# EAGLE board scout_mk2 (EAGLE 7.1.0)
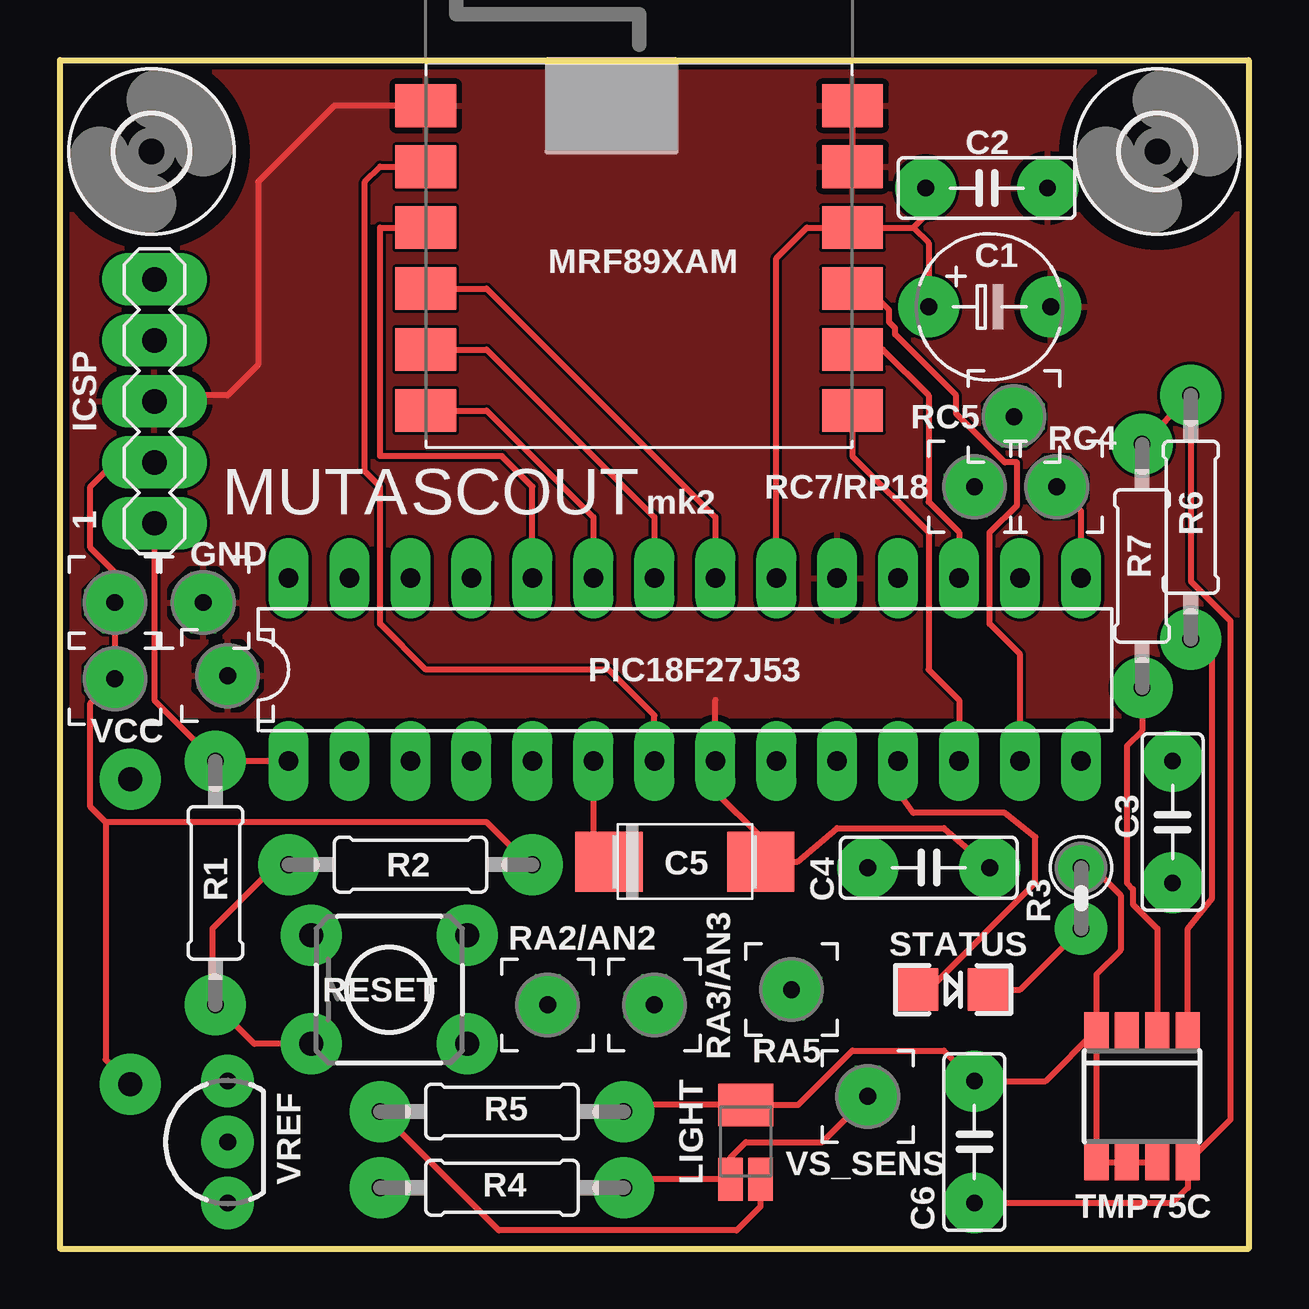
[diagram p0: board, top side]
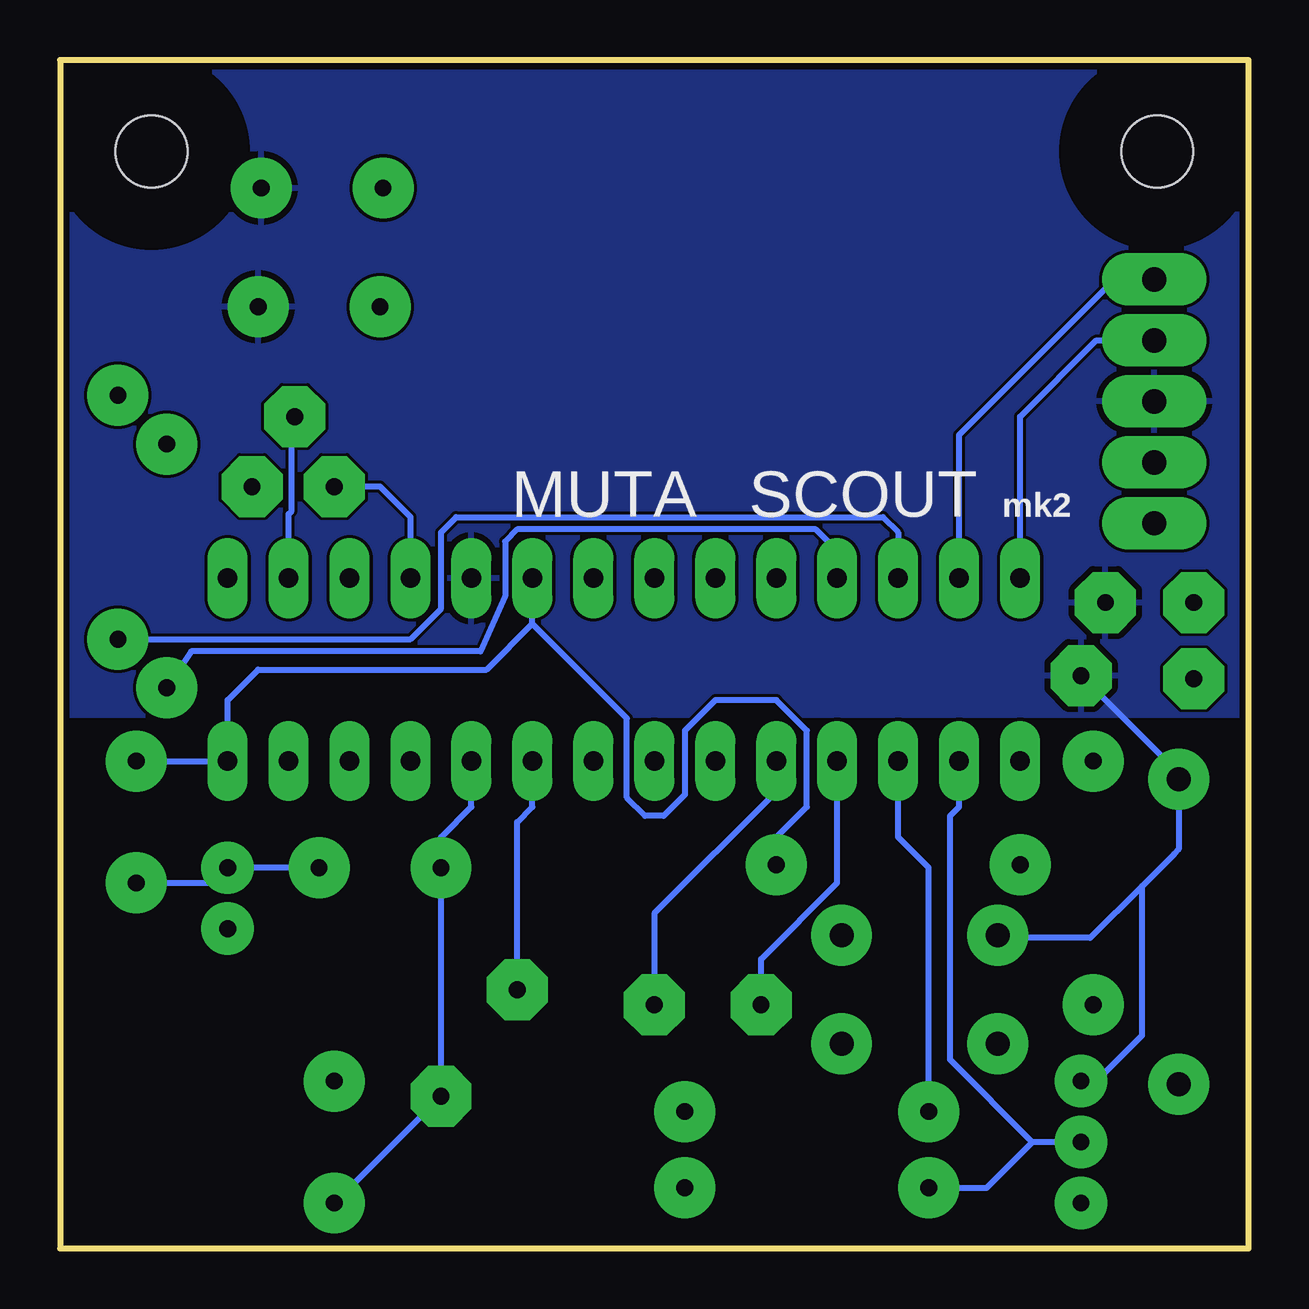
[diagram p1: board, bottom side, seen from below]

Size 49.53 x 49.53 mm. Coordinates in mm from the lower left corner, seen from the top.
Outline: 0,49.53 49.53,49.53 49.53,0 0,0 0,49.53
Copper layers (1*16): Top 0.035mm / dielectric 1.5mm / Bottom 0.035mm
Design rules "dirt_cheap_dirty_boards.v1": minimum track width 5mil, minimum drill 12mil, track to track 5mil, track to pad 5mil, pad to pad 5mil, via to via 5mil, smd to smd 0mil, copper to edge 10mil, drill to drill 10mil, minimum pad ring 10mil, minimum via ring 6mil, stop-mask expansion 2mil, vias tented up to drill 25mil, thermal gap 10mil

## Footprints (pad centres in the part's own frame; a part is rotated, then mirrored left to right if it is on the bottom)
2XAAA = drill 1 pad 2.54: P$1 0,12.7; P$2 0,0
TT5D6 = drill 0.7 pad 2.54: + -2.54,0; - 2.54,0
C050-025X075 = drill 0.7 pad 2.54: 1 -2.54,0; 2 2.54,0
C/6032-28R = smd 2.794 x 2.5: + 3.16,0; - -3.16,0
3,81/1,1 = drill 0.7 pad 2.54 octagon: 1 0,0
MA05-1 = drill 1.016 pad 2.184 long: 1 -5.08,0; 2 -2.54,0; 3 0,0; 4 2.54,0; 5 5.08,0
SFH5711 = smd 2.286 x 1.778: 1_2 0,1.549 | smd 1.016 x 1.778: 3 -0.635,-1.549; 4 0.61,-1.549
MRF89XAMXA = smd 2.54 x 1.778: 1 -8.89,-1.27; 2 -8.89,-3.81; 3 -8.89,-6.35; 4 -8.89,-8.89; 5 -8.89,-11.43; 6 -8.89,-13.97; 7 8.89,-13.97; 8 8.89,-11.43; 9 8.89,-8.89; 10 8.89,-6.35; 11 8.89,-3.81; 12 8.89,-1.27
DIL28-3 = drill 0.813 pad 1.676 long: 1 -16.51,-3.81; 2 -13.97,-3.81; 3 -11.43,-3.81; 4 -8.89,-3.81; 5 -6.35,-3.81; 6 -3.81,-3.81; 7 -1.27,-3.81; 8 1.27,-3.81; 9 3.81,-3.81; 10 6.35,-3.81; 11 8.89,-3.81; 12 11.43,-3.81; 13 13.97,-3.81; 14 16.51,-3.81; 15 16.51,3.81; 16 13.97,3.81; 17 11.43,3.81; 18 8.89,3.81; 19 6.35,3.81; 20 3.81,3.81; 21 1.27,3.81; 22 -1.27,3.81; 23 -3.81,3.81; 24 -6.35,3.81; 25 -8.89,3.81; 26 -11.43,3.81; 27 -13.97,3.81; 28 -16.51,3.81
0207/10 = drill 0.7 pad 2.54: 1 -5.08,0; 2 5.08,0
0207/2V = drill 0.7 pad 2.184: 1 -1.27,0; 2 1.27,0
TACTILE-PTH = drill 1 pad 2.54: 1 -3.251,2.261; 2 3.251,2.261; 3 -3.251,-2.261; 4 3.251,-2.261
LED-1206 = smd 1.778 x 1.778: A -1.5,0; C 1.5,0
SOIC8 = smd 1.016 x 1.5: 1 -1.905,-2.75; 2 -0.635,-2.75; 3 0.635,-2.75; 4 1.905,-2.75; 5 1.905,2.75; 6 0.635,2.75; 7 -0.635,2.75; 8 -1.905,2.75
3,0 = hole 3: 0,0
LP_O-PBCY-W3 = drill 0.7 pad 2.184: 1 -2.54,0; 2 0,0; 3 2.54,0

## Placement (x,y rotation side)
BATT1  AAA  [2XAAA]  2.92,6.86 0 top
C1  10uF  [TT5D6]  38.73,39.24 0 top
C2  0.1uF  [C050-025X075]  38.61,44.2 0 top
C3  0.1uF  [C050-025X075]  46.35,17.78 270 top
C4  0.1uF  [C050-025X075]  36.2,15.88 0 top
C5  10uF  [C/6032-28R]  26.04,16.13 180 top
C6  0.01uF  [C050-025X075]  38.1,4.45 90 top
GND  [3,81/1,1]  6.99,23.88 0 top
GND17  [3,81/1,1]  5.97,26.92 0 top
ICSP  [MA05-1]  3.94,35.31 90 top
LIGHTSENSOR  SFH5711OSRAM  [SFH5711]  28.57,4.45 0 top
MRF89XAM  MRF89XAM8A  [MRF89XAMXA]  24.13,48.9 0 top
PIC18F27J53  PIC18F27J53SP  [DIL28-3]  26.04,24.13 0 top
R1  100  [0207/10]  6.48,15.24 90 top
R2  10k  [0207/10]  14.61,16 0 top
R3  10k  [0207/2V]  42.55,14.61 270 top
R4  47k  [0207/10]  18.41,5.71 180 top
R5  1k  [0207/10]  18.41,2.54 0 top
R6  10k  [0207/10]  47.12,30.48 90 top
R7  10k  [0207/10]  45.09,28.45 90 top
RA2/AN2  [3,81/1,1]  20.32,10.16 0 top
RA3/AN3  [3,81/1,1]  24.77,10.16 0 top
RA5  [3,81/1,1]  30.48,10.79 0 top
RC4  [3,81/1,1]  41.53,31.75 0 top
RC5  [3,81/1,1]  39.75,34.67 0 top
RC7/RP18  [3,81/1,1]  38.1,31.75 0 top
RESET  SWITCH-MOMENTARY-2PTH  [TACTILE-PTH]  13.72,10.79 0 top
STATUS  [LED-1206]  37.21,10.79 0 top
TMP75C  TMP75CSOIC8  [SOIC8]  45.09,6.35 180 top
U$2  [3,0]  3.81,45.72 0 top
U$3  [3,0]  45.72,45.72 0 top
VCC  [3,81/1,1]  2.29,26.92 0 top
VCC1  [3,81/1,1]  2.29,23.75 0 top
VREF  LM285-1.21.2LP  [LP_O-PBCY-W3]  6.99,4.45 90 top
VS_SENS  [3,81/1,1]  33.66,6.35 0 top

## Library data of the parts
BATT1 LIGHTSENSOR TMP75C = nio
C1 C5 = resistor
C2-C4 C6 = rcl
GND GND17 RA2/AN2 RA3/AN3 RA5 RC4 RC5 RC7/RP18 VCC VCC1 VS_SENS = wirepad
ICSP = con-lstb; OC_FARNELL: unknown; OC_NEWARK: unknown
MRF89XAM = microchip2
PIC18F27J53 = microchip; MPN: PIC18F27J53-I/SP; OC_FARNELL: unknown; OC_NEWARK: 63R7839
R1-R7 = resistor; SPICEPREFIX: R
RESET = SparkFun-Electromechanical
STATUS = SparkFun-LED
U$2 U$3 = holes
VREF = texas

## Nets
GND: BATT1.P$1 C1.- C2.2 C3.2 C4.2 C5.- C6.2 GND17.1 GND.1 ICSP.3 LIGHTSENSOR.1_2 MRF89XAM.1 MRF89XAM.11 MRF89XAM.12 PIC18F27J53.8 PIC18F27J53.19 R3.1 R4.1 RESET.1 TMP75C.4 TMP75C.5 TMP75C.6 TMP75C.7 VREF.3
N$2: LIGHTSENSOR.4 PIC18F27J53.3 R4.2
N$3: ICSP.1 PIC18F27J53.1 R1.2
N$4: C5.+ PIC18F27J53.6
N$5: R1.1 R2.1 RESET.3
N$6: ICSP.4 PIC18F27J53.28
N$7: ICSP.5 PIC18F27J53.27
N$8: PIC18F27J53.2 R5.1 VREF.2
N$9: MRF89XAM.2 PIC18F27J53.7
N$10: MRF89XAM.6 PIC18F27J53.23
N$11: PIC18F27J53.26 R6.1 TMP75C.1
N$12: PIC18F27J53.25 R7.1 TMP75C.2
N$13: PIC18F27J53.9 RA5.1
N$14: R3.2 STATUS.C
N$15: PIC18F27J53.11 STATUS.A
N$16: PIC18F27J53.4 RA2/AN2.1
N$17: PIC18F27J53.5 RA3/AN3.1
N$19: MRF89XAM.7 PIC18F27J53.12
N$21: MRF89XAM.3 PIC18F27J53.24
N$22: MRF89XAM.5 PIC18F27J53.22
N$23: MRF89XAM.4 PIC18F27J53.21
N$24: MRF89XAM.9 PIC18F27J53.13
N$25: MRF89XAM.8 PIC18F27J53.17
N$26: PIC18F27J53.18 RC7/RP18.1
N$27: PIC18F27J53.16 RC5.1
N$28: PIC18F27J53.15 RC4.1
N$29: C4.1 C6.1 LIGHTSENSOR.3 PIC18F27J53.10 R5.2 R6.2 R7.2 TMP75C.8 VS_SENS.1
VCC: BATT1.P$2 C1.+ C2.1 C3.1 ICSP.2 MRF89XAM.10 PIC18F27J53.14 PIC18F27J53.20 R2.2 VCC1.1 VCC.1

## Tracks (layer width: path | path; a pad name or v marks a point on that pad's centre or on a via)
GND
  Top 0.254: MRF89XAM.1 11.43,47.62 8.26,44.45 8.26,36.83 6.99,35.56 4.19,35.56 ICSP.3 | MRF89XAM.12 MRF89XAM.11 | 27.3,22.86 PIC18F27J53.8 27.3,19.05 29.2,17.16 C5.- 30.73,16.13 32.38,17.53 36.83,17.53 C4.2 | R3.1 43.05,15.88 44.2,14.73 44.2,12.45 43.18,11.43 TMP75C.4 | TMP75C.4 TMP75C.5 TMP75C.6 TMP75C.7 | R4.1 23.77,5.99 LIGHTSENSOR.1_2 30.76,5.99 33.02,8.26 36.83,8.26 C6.2 41.06,6.99 TMP75C.4
  Bottom 0.254: C4.2 R3.1 43.18,15.24 C3.2 | GND.1 2.92,19.81 BATT1.P$1 2.92,16.64 3.11,16.45 4.45,15.11 | 4.45,15.11 6.6,12.95 10.36,12.95 RESET.1 | VREF.3 6.35,6.99 4.45,8.89 4.45,15.11
  pour Bottom (isolate 0.025): -0.89,50.55 -0.89,22.23 50.16,22.23 50.16,50.55
  pour Top (isolate 0.025): -1.52,50.55 -1.52,22.23 51.44,22.23 51.44,50.55
N$2
  Top 0.254: LIGHTSENSOR.4 29.18,1.75 28.19,0.76 18.29,0.76 R4.2
  Bottom 0.254: R4.2 13.34,15.88 14.61,17.14 PIC18F27J53.3
N$3
  Top 0.254: ICSP.1 3.94,22.86 R1.2 PIC18F27J53.1
N$4
  Top 0.254: PIC18F27J53.6 22.23,16.78 C5.+
N$5
  Top 0.254: RESET.3 8.1,8.53 R1.1 6.35,10.29 6.35,13.34 9.02,16 R2.1
N$6
  Bottom 0.254: PIC18F27J53.28 9.53,34.67 6.35,37.85 ICSP.4
N$7
  Bottom 0.254: PIC18F27J53.27 12.06,33.91 5.59,40.39 ICSP.5
N$8
  Bottom 0.254: VREF.2 9.02,4.45 | 9.02,4.45 12.45,7.87 12.45,18.03 12.06,18.41 PIC18F27J53.2 | R5.1 10.92,2.54 9.02,4.45
N$9
  Top 0.254: PIC18F27J53.7 24.77,22.23 22.86,24.13 15.24,24.13 13.34,26.04 13.34,31.75 12.7,32.38 12.7,44.45 13.34,45.09 MRF89XAM.2
N$10
  Top 0.254: MRF89XAM.6 17.78,34.92 22.23,30.48 PIC18F27J53.23
N$11
  Top 0.254: TMP75C.1 46.99,13.34 48.01,14.61 48.01,24.77 R6.1
  Bottom 0.254: R6.1 34.92,25.4 33.66,26.67 33.66,29.84 33.02,30.48 15.24,30.48 14.61,29.84 PIC18F27J53.26
N$12
  Top 0.254: R7.1 45.09,21.59 44.45,20.95 44.45,15.24 44.7,14.99 44.7,14.35 45.72,13.34 TMP75C.2
  Bottom 0.254: PIC18F27J53.25 17.14,29.08 18.03,29.97 30.48,29.97 30.99,29.46 30.99,27.18 32,24.89 44.07,24.89 R7.1
N$13
  Bottom 0.254: RA5.1 30.48,17.78 29.84,18.41 PIC18F27J53.9
N$14
  Top 0.254: STATUS.C 40.01,10.79 R3.2
N$15
  Top 0.254: STATUS.A 36.2,10.79 40.64,15.24 40.64,17.14 39.37,18.16 35.56,18.16 34.92,19.05 PIC18F27J53.11
N$16
  Bottom 0.254: RA2/AN2.1 20.32,12.06 17.14,15.24 PIC18F27J53.4
N$17
  Bottom 0.254: PIC18F27J53.5 19.68,19.05 24.77,13.97 RA3/AN3.1
N$19
  Top 0.254: MRF89XAM.7 33.02,33.02 36.2,29.84 36.2,24.13 37.47,22.86 PIC18F27J53.12
N$21
  Top 0.254: PIC18F27J53.24 19.68,31.75 18.41,33.02 13.34,33.02 13.34,42.55 MRF89XAM.3
N$22
  Top 0.254: MRF89XAM.5 17.78,37.47 24.77,30.48 PIC18F27J53.22
N$23
  Top 0.254: MRF89XAM.4 17.78,40.01 27.3,30.48 PIC18F27J53.21
N$24
  Top 0.254: PIC18F27J53.13 40.01,24.77 38.73,26.04 38.73,29.84 39.88,30.99 39.88,32.77 39.37,32.77 37.34,34.8 37.34,35.56 34.8,38.1 34.8,38.35 34.54,38.61 34.54,39.12 33.78,39.88 33.15,39.88 MRF89XAM.9
N$25
  Top 0.254: MRF89XAM.8 34.29,37.47 36.2,35.56 36.2,31.11 37.47,29.84 PIC18F27J53.17
N$26
  Bottom 0.254: PIC18F27J53.18 34.92,30.48 36.2,31.75 RC7/RP18.1
N$27
  Bottom 0.254: PIC18F27J53.16 40.01,30.61 39.88,30.73 39.88,34.54 RC5.1
N$28
  Top 0.254: PIC18F27J53.15 42.55,30.73 RC4.1
N$29
  Top 0.254: C6.1 46.35,1.91 46.99,2.54 TMP75C.8 48.77,5.38 48.77,26.16 47.12,27.81 R6.2 R7.2 | R5.2 24.49,2.9 LIGHTSENSOR.3 27.94,3.81 28.57,4.45 31.75,4.45 VS_SENS.1
  Bottom 0.254: C6.1 VS_SENS.1 C4.1 33.66,17.14 32.38,18.41 PIC18F27J53.10
VCC
  Top 0.254: 35.56,42.55 36.2,43.18 36.2,44.07 C2.1 | 35.56,42.55 MRF89XAM.10 31.11,42.55 29.84,41.27 PIC18F27J53.20 | 35.56,42.55 36.2,41.91 C1.+ | R2.2 19.56,16 17.78,17.78 1.91,17.78 | 1.91,17.78 1.27,18.41 1.27,22.73 VCC1.1 VCC.1 2.29,28.19 1.27,29.21 1.27,31.75 2.29,32.77 ICSP.2 | 1.91,17.78 1.91,7.87 BATT1.P$2
  Bottom 0.254: C3.1 PIC18F27J53.14 42.55,22.86 41.27,24.13 31.75,24.13 29.84,26.04 | 29.84,26.04 PIC18F27J53.20 | R2.2 19.68,17.14 18.41,18.41 18.41,21.59 19.68,22.86 22.23,22.86 23.5,21.59 23.5,18.92 24.38,18.03 25.15,18.03 25.91,18.8 25.91,22.1 29.84,26.04

## Text on the board
tNames: MUTA | SCOUT | mk2 | 1 | LIGHT
bNames: mk2 | SCOUT | MUTA